# Altium PCB POWERDIST_DARNET_2022.PcbDoc
Units mm, origin at the board's own origin, x right, y up, seen from the top; angles counter-clockwise.
Board outline 127.25 x 57.15 mm, 2 copper layers (Top Layer, Bottom Layer); 17 components, 8 nets, 77 pads, 0 vias.
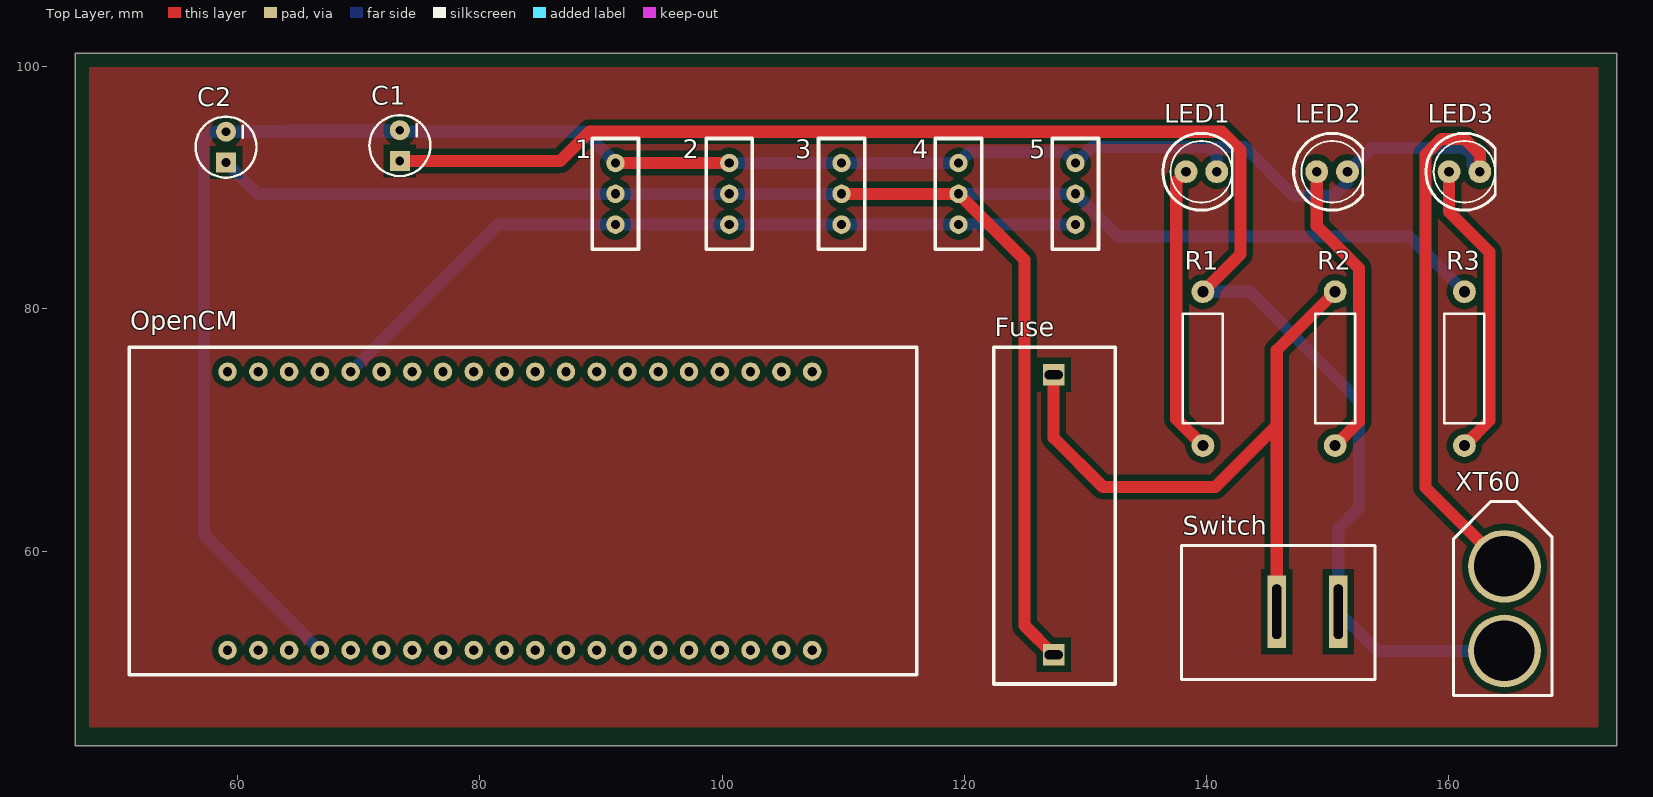
[diagram p0: Top Layer view]
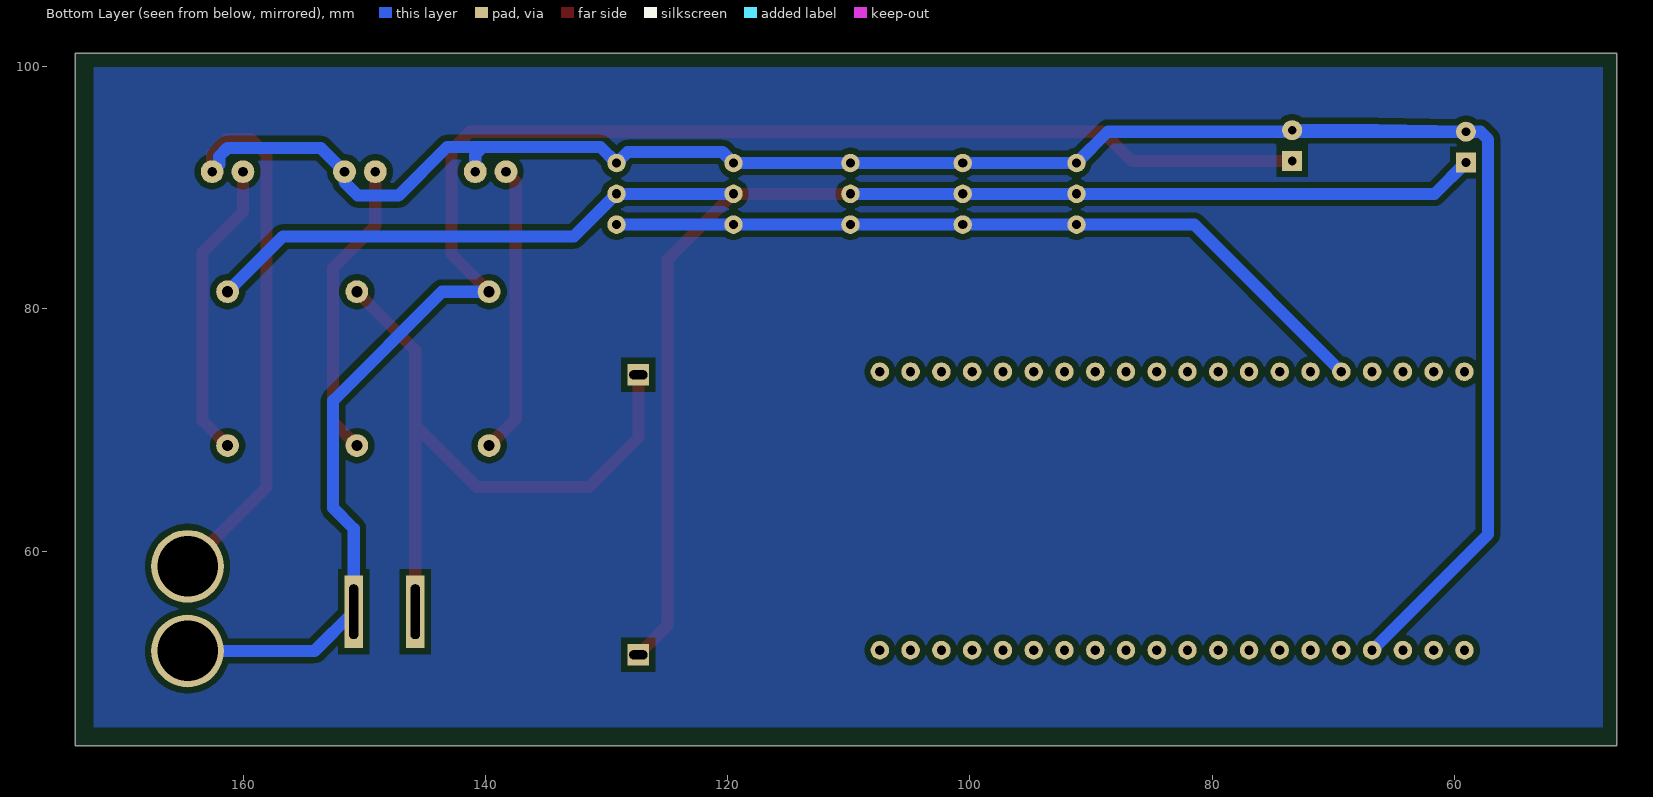
[diagram p1: Bottom Layer view, seen from below]

## Layer stack, top to bottom
Top Solder: solder mask 0.0102, Solder Resist, Dk 3.5
Top Layer: signal copper 0.0356
Dielectric 1: dielectric 0.32, FR-4, Dk 4.8
Bottom Layer: signal copper 0.0356
Bottom Solder: solder mask 0.0102, Solder Resist, Dk 3.5

## Board outline
46.609,43.942 173.863,43.942 173.863,101.092 46.609,101.092

## Design rules (kind name [scope] priority, off if disabled: settings)
Clearance [All] p1: gap=0.5 ignorepadtopadclearanceinfootprint=FALSE
PolygonConnect [All] p1: connectstyle=Relief reliefconductorwidth=0.254 reliefentries=4 polygonreliefangle="90 Angle" airgapwidth=0.254
RoutingVias [All] p1: holewidth=0.711 width=1.27 viastyle="Through Hole" minholewidth=0.711 minwidth=1.27 maxholewidth=0.711 maxwidth=1.27
SolderMaskExpansion [All] p1: expansion=0.102 istentingtop=FALSE
Width [All] p1: maxlimit=1 minlimit=1 preferedwidth=1
30 further rules are at their usual default settings.

## Classes and differential pairs
component class POWERDIST_DARNET_2022: 1 2 3 4 5 C1 C2 Fuse LED1 LED2 LED3 R1 R2 R3

## Components (designator, comment, footprint, x,y, rotation, side; value= is the part's Value field where it differs from the comment)
1 "MOLEX" MOLEX 91.202,89.488 r270 top
2 "MOLEX" MOLEX 100.6,89.488 r270 top
3 "MOLEX" MOLEX 109.871,89.488 r270 top
4 "MOLEX" MOLEX 119.523,89.488 r270 top
5 "MOLEX" MOLEX 129.175,89.488 r270 top
C1 "" CPOL-RADIAL-10UF-25V 73.406,93.472 r270 top
C2 "" CPOL-RADIAL-10UF-25V 59.055,93.345 r270 top
Fuse "BLX_A" BLX_A 127.381,62.992 r90 top (schematic designator *)
LED1 "" LED5MM 139.573,91.313 r0 top
LED2 "" LED5MM 150.368,91.313 r0 top
LED3 "" LED5MM 161.29,91.313 r0 top
OpenCM "OpenCM" OpenCM 83.312,63.309 r0 top (schematic designator *)
R1 "" AXIAL-0.5 139.7,75.057 r90 top
R2 "" AXIAL-0.5 150.622,75.057 r90 top
R3 "" AXIAL-0.5 161.29,75.057 r90 top
Switch "Switch" Switch 148.336,54.991 r180 top (schematic designator *)
XT60 "XT60" XT60 164.592,55.245 r90 top (schematic designator *)

## Footprints (in the part's own frame and the unit in brackets; to place one, negate y for a bottom-side part, rotate by r counter-clockwise, add the part's x,y. Pads: shape width x height; smd on the part's side, far side on the other; paste and mask are expansions set on the pad)
AXIAL-0.5 [mil]
  round 74 hole 36: P$1(-250,0) P$2(250,0)
  silkscreen extent -177,-65 178,65
BLX_A [mm]
  rect 1.8x1.8 hole 0.762 slot 1.5 at 90 deg: 0(-11.557,0) 1(11.557,0)
  silkscreen extent -13.97,-5.08 13.84,4.95
CPOL-RADIAL-10UF-25V [mil]
  rect 65x65 hole 28: 1(50,0)
  round 65 hole 28: 2(-50,0)
  silkscreen extent -99,-99 99,99
LED5MM [mil]
  round 74 hole 32: A(-50,0) K(50,0)
  silkscreen extent -125,-125 100,125
MOLEX [mil]
  round 60 hole 30: 0(-100,0) 1(0,0) 2(100,0)
  silkscreen extent -180,-75 180,75
OpenCM [mil]
  round 60 hole 30: 0(-950,-452.5) 1(-850,-452.5) 2(-750,-452.5) 3(-650,-452.5) 4(-550,-452.5) 5(-450,-452.5) 6(-350,-452.5) 7(-250,-452.5) 8(-150,-452.5) 9(-50,-452.5) 10(50,-452.5) 11(150,-452.5) 12(250,-452.5) 13(350,-452.5) 14(450,-452.5) 15(550,-452.5) 16(650,-452.5) 17(750,-452.5) 18(850,-452.5) 19(950,-452.5) 20(-950,452.5) 21(-850,452.5) 22(-750,452.5) 23(-650,452.5) 24(-550,452.5) 25(-450,452.5) 26(-350,452.5) 27(-250,452.5) 28(-150,452.5) 29(-50,452.5) 30(50,452.5) 31(150,452.5) 32(250,452.5) 33(350,452.5) 34(450,452.5) 35(550,452.5) 36(650,452.5) 37(750,452.5) 38(850,452.5) 39(950,452.5)
  silkscreen extent -1270,-532 1290,532
Switch [mil]
  rect 60x236.22 hole 30 slot 177.17 at 90 deg: 0(-100,0) 1(100,0)
  silkscreen extent -220,-215 410,220
XT60 [mm]
  round 6 hole 5: 0(3.492,0) 1(-3.492,0)
  silkscreen extent -7.18,-3.94 8.83,4.19

## Part data
C1 C2: library part CAP_POLPTH2
LED1 LED2 LED3: library part LED5MM
R1 R2 R3: library part RESISTORPTH-1/2W

## Nets (pads, with @x,y where several pads share a name; then routed paths per layer and width w, separated by ;. In a path a pad name is that pad's centre, name@x,y a point inside that pad or via, vN(x,y) a via of type N, cw(c..) or ccw(c..) an arc to the next point about the centre after c; other vN are vias at no path point)
Net1_0: 1.0 2.0 3.0 4.0 5.0 C1.2 C2.2 LED1.K LED2.K LED3.K OpenCM.3 XT60.0 | length 228.9
  Top Layer w1: 1.0 2.0 ; LED3.K 162.56,92.761 161.29,94.031 159.385,94.031 158.064,92.71 158.064,65.265 XT60.0
  Bottom Layer w1: OpenCM.3 57.226,61.392 57.226,93.98 57.861,94.615 C2.2 ; C1.2 66.37,94.742 C2.2 ; LED1.K 140.843,92.71 140.183,93.37 ; LED3.K 161.976,91.897 161.976,92.583 161.29,93.269 153.594,93.269 LED2.K 151.638,90.449 150.546,89.357 147.168,89.357 143.154,93.37 140.183,93.37 ; C2.2 88.615,94.615 1.0 2.0 3.0 4.0 120.433,92.939 128.265,92.939 5.0 130.517,93.37 140.183,93.37
Net1_1: 1.1 2.1 3.1 4.1 5.1 C2.1 Fuse.0 R3.P$2 | length 148
  Top Layer w1: 3.1 4.1 124.968,84.043 124.968,53.848 Fuse.0
  Bottom Layer w1: C2.1 61.642,89.488 1.1 2.1 3.1 ; 4.1 5.1 132.684,85.979 156.718,85.979 R3.P$2
Net1_2: 1.2 2.2 3.2 4.2 5.2 OpenCM.24 | length 64.9
  Bottom Layer w1: OpenCM.24 81.487,86.948 1.2 2.2 3.2 4.2 5.2
Net*_0: C1.1 R1.P$2 Switch.0 XT60.1 | length 133.8
  Top Layer w1: C1.1 86.639,92.202 89.052,94.615 141.275,94.615 142.799,93.091 142.799,84.506 R1.P$2
  Bottom Layer w1: R1.P$2 143.587,81.407 152.578,72.416 152.578,63.551 150.876,61.849 Switch.0 154.114,51.752 XT60.1
Net*_1: Fuse.1 R2.P$2 Switch.1 | length 56
  Top Layer w1: Fuse.1 127.381,69.342 131.445,65.278 140.716,65.278 145.796,70.358 ; Switch.1 145.796,70.358 ; R2.P$2@150.749,81.28 R2.P$2 145.796,76.581 145.796,70.358
NetLED1_A: LED1.A R1.P$1 | length 23.8
  Top Layer w1: LED1.A 137.503,90.513 137.503,70.904 R1.P$1
NetLED2_A: LED2.A R2.P$1 | length 24.9
  Top Layer w1: LED2.A 149.098,86.843 152.578,83.363 152.578,70.663 R2.P$1
NetLED3_A: LED3.A R3.P$1 | length 24.8
  Top Layer w1: LED3.A 160.02,88.011 163.347,84.684 163.347,70.764 R3.P$1
pads on no net: OpenCM.0 OpenCM.1 OpenCM.2 OpenCM.4 OpenCM.5 OpenCM.6 OpenCM.7 OpenCM.8 OpenCM.9 OpenCM.10 OpenCM.11 OpenCM.12 OpenCM.13 OpenCM.14 OpenCM.15 OpenCM.16 OpenCM.17 OpenCM.18 OpenCM.19 OpenCM.20 OpenCM.21 OpenCM.22 OpenCM.23 OpenCM.25 OpenCM.26 OpenCM.27 OpenCM.28 OpenCM.29 OpenCM.30 OpenCM.31 OpenCM.32 OpenCM.33 OpenCM.34 OpenCM.35 OpenCM.36 OpenCM.37 OpenCM.38 OpenCM.39

## Polygon pours and split planes (outlines as drawn)
no net on Top Layer "NONET_L01_P000" (solid, pour order 0): 47.752,99.949 47.752,45.466 172.466,45.466 172.339,45.593 172.339,99.949
no net on Bottom Layer "NONET_L02_P001" (solid, pour order 1): 47.752,99.949 47.752,45.466 172.339,45.466 172.339,99.949

## Silkscreen, mask and mechanical layers (free items; w line width, h text height)
Mechanical 1:
  lines w1: 46.736,44.45 46.736,101.092 173.609,101.092 173.609,44.45 46.736,44.45

## Dimensions
42.545,101.6 to 43.053,44.831 on Mechanical 1
173.609,41.783 to 46.863,41.021 on Mechanical 1